# EAGLE board rfm69 (EAGLE 6.6.0)
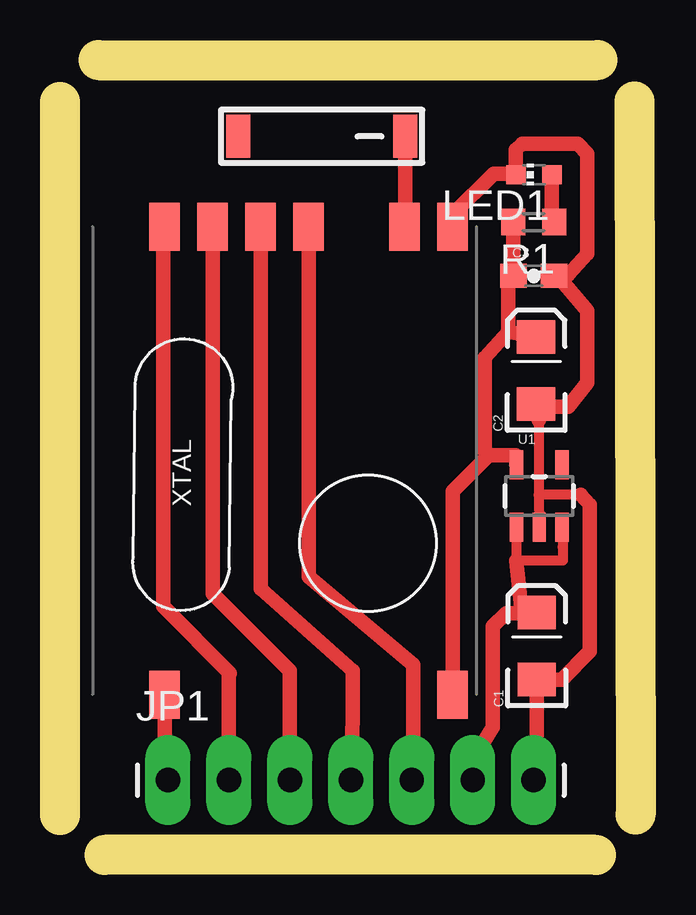
[diagram p0: board, top side]

Size 23.98 x 33.12 mm. Coordinates in mm from the lower left corner, seen from the top.
Outline: 1.6,33.12 22.4,33.12
Outline: 23.93,31.39 23.98,1.68
Outline: 22.33,0 1.85,0
Outline: 0,1.66 0,31.36
Copper layers (1*16): Top 0.035mm / dielectric 1.5mm / Bottom 0.035mm
Design rules "ITEADstudio_DRC": minimum track width 6mil, minimum drill 12mil, track to track 6mil, track to pad 6mil, pad to pad 6mil, via to via 6mil, smd to smd 0mil, copper to edge 10mil, drill to drill 10mil, minimum pad ring 10mil, minimum via ring 6mil, stop-mask expansion 2mil, vias tented up to drill 100mil, thermal gap 10mil
Net classes: 1 power: width 0.381 mm, clearance 0.254 mm

## Footprints (pad centres in the part's own frame; a part is rotated, then mirrored left to right if it is on the bottom)
EIA3216 = smd 1.4 x 1.6: A 1.4,0; C -1.4,0
0603-CAP = smd 1.1 x 1: 1 -0.85,0; 2 0.85,0
1X07_LONGPADS = drill 1.016 pad 1.88 long: 1 0,0; 2 2.54,0; 3 5.08,0; 4 7.62,0; 5 10.16,0; 6 12.7,0; 7 15.24,0
CHIP-LED0603 = smd 0.8 x 0.8: A 0,-0.75; C 0,0.75
R0603 = smd 1 x 1.1: 1 -0.85,0; 2 0.85,0
SOT23-5 = smd 0.55 x 1.2: 1 -0.95,-1.3; 2 0,-1.3; 3 0.95,-1.3; 4 0.95,1.3; 5 -0.95,1.3
915MHZ-ANTENNA = smd 1 x 1.8: ATTACH 3.48,0; SIGNAL -3.48,0
RFM69W-MINPADS = smd 2 x 1.27: ANA 8,-5; DIO0 -11.5,5; GND 8,-7; MISO 8,1; MOSI 8,3; NSS 8,5; SCK 8,-1; VDD -11.5,-7

## Placement (x,y rotation side)
C1  [EIA3216]  19.87,8.71 90 top
C2  [EIA3216]  19.84,20.19 90 top
C3  [0603-CAP]  19.74,24.13 0 top
JP1  [1X07_LONGPADS]  4.5,3.12 0 top
LED1  [CHIP-LED0603]  19.75,28.34 90 top
R1  10k  [R0603]  19.73,26.37 180 top
U1  V_REG_LDOSMD  [SOT23-5]  19.97,14.96 0 top
U$1  915MHZ-ANTENNA-SMD  [915MHZ-ANTENNA]  10.9,29.94 180 top
U$5  RFM69  [RFM69W-MINPADS]  9.36,18.18 90 top

## Library data of the parts
C1-C3 = SparkFun-Passives
JP1 = SparkFun-Connectors
LED1 R1 = adafruit
U1 = SparkFun-PowerIC
U$1 = ITP_Lab
U$5 = LowPowerLab

## Nets
D2: JP1.1 U$5.DIO0
D10_SS: JP1.2 U$5.NSS
D11_MOSI: JP1.3 U$5.MOSI
D12_MISO: JP1.4 U$5.MISO
D13_SCK: JP1.5 U$5.SCK
GND [power]: C1.C C2.C C3.2 JP1.7 LED1.C U1.2 U$5.GND
N$1: U$1.SIGNAL U$5.ANA
N$2: LED1.A R1.1
VCC: C2.A C3.1 R1.2 U1.5 U$5.VDD
VSS: C1.A JP1.6 U1.1 U1.3

## Tracks (layer width: path | path; a pad name or v marks a point on that pad's centre or on a via)
D2
  Top 0.61: 4.54,6.51 U$5.DIO0 4.36,2.92 JP1.1
D10_SS
  Top 0.61: U$5.NSS 4.3,26.12 4.3,10.36 7.08,7.58 7.04,7.58 JP1.2
D11_MOSI
  Top 0.61: U$5.MOSI 6.36,10.88 9.58,7.67 9.58,2.96 JP1.3
D12_MISO
  Top 0.61: U$5.MISO 8.36,11.09 12.2,7.67 12.17,3.08 12.12,3.08 JP1.4
D13_SCK
  Top 0.61: U$5.SCK 10.36,11.58 14.71,7.92 14.71,3.12 | 14.71,3.12 14.71,2.96 | JP1.5 14.71,3.12
GND
  Top 0.406: 21.7,15.01 19.94,15.01 | 19.94,15.01 U1.2 | 19.94,18.11 19.94,15.01
  Top 0.61: 19.78,7.22 C1.C | C1.C 20.9,7.31 22.08,8.48 22.08,14.6 21.7,15.01 | 19.94,18.11 19.89,18.41 C2.C 19.99,18.67 21.19,18.67 21.97,19.68 21.97,22.68 20.69,24.17 C3.2 20.64,24.18 21.19,24.18 21.97,25.04 21.97,29.21 21.57,29.64 19.26,29.64 19,29.38 LED1.C 18.95,28.39 18.06,28.39 16.36,26.69 U$5.GND | JP1.7 19.87,2.92 C1.C
N$1
  Top 0.61: U$5.ANA 14.38,26.18 U$1.SIGNAL
N$2
  Top 0.61: LED1.A 20.5,26.45 R1.1
VCC
  Top 0.61: U$5.VDD 16.36,15.16 17.86,16.66 | 17.86,16.66 18.99,16.66 U1.5 | C2.A 18.68,21.79 | 18.68,21.79 17.71,20.72 17.71,16.81 17.86,16.66 | 18.68,21.79 18.68,24.32 C3.1 R1.2
VSS
  Top 0.406: U1.1 19.02,12.27 20.96,12.27 20.94,12.83 U1.3
  Top 0.61: 19.28,10.08 18.6,10.08 18.04,9.52 18.04,5.33 17.24,4.02 17.24,2.92 JP1.6 | 19.28,10.08 19.84,10.08 C1.A | 19.02,12.27 19.25,10.12 19.28,10.08